# EAGLE board 14073-LuMini_3Inch-panel (EAGLE 9.0.1), part 1 of 3
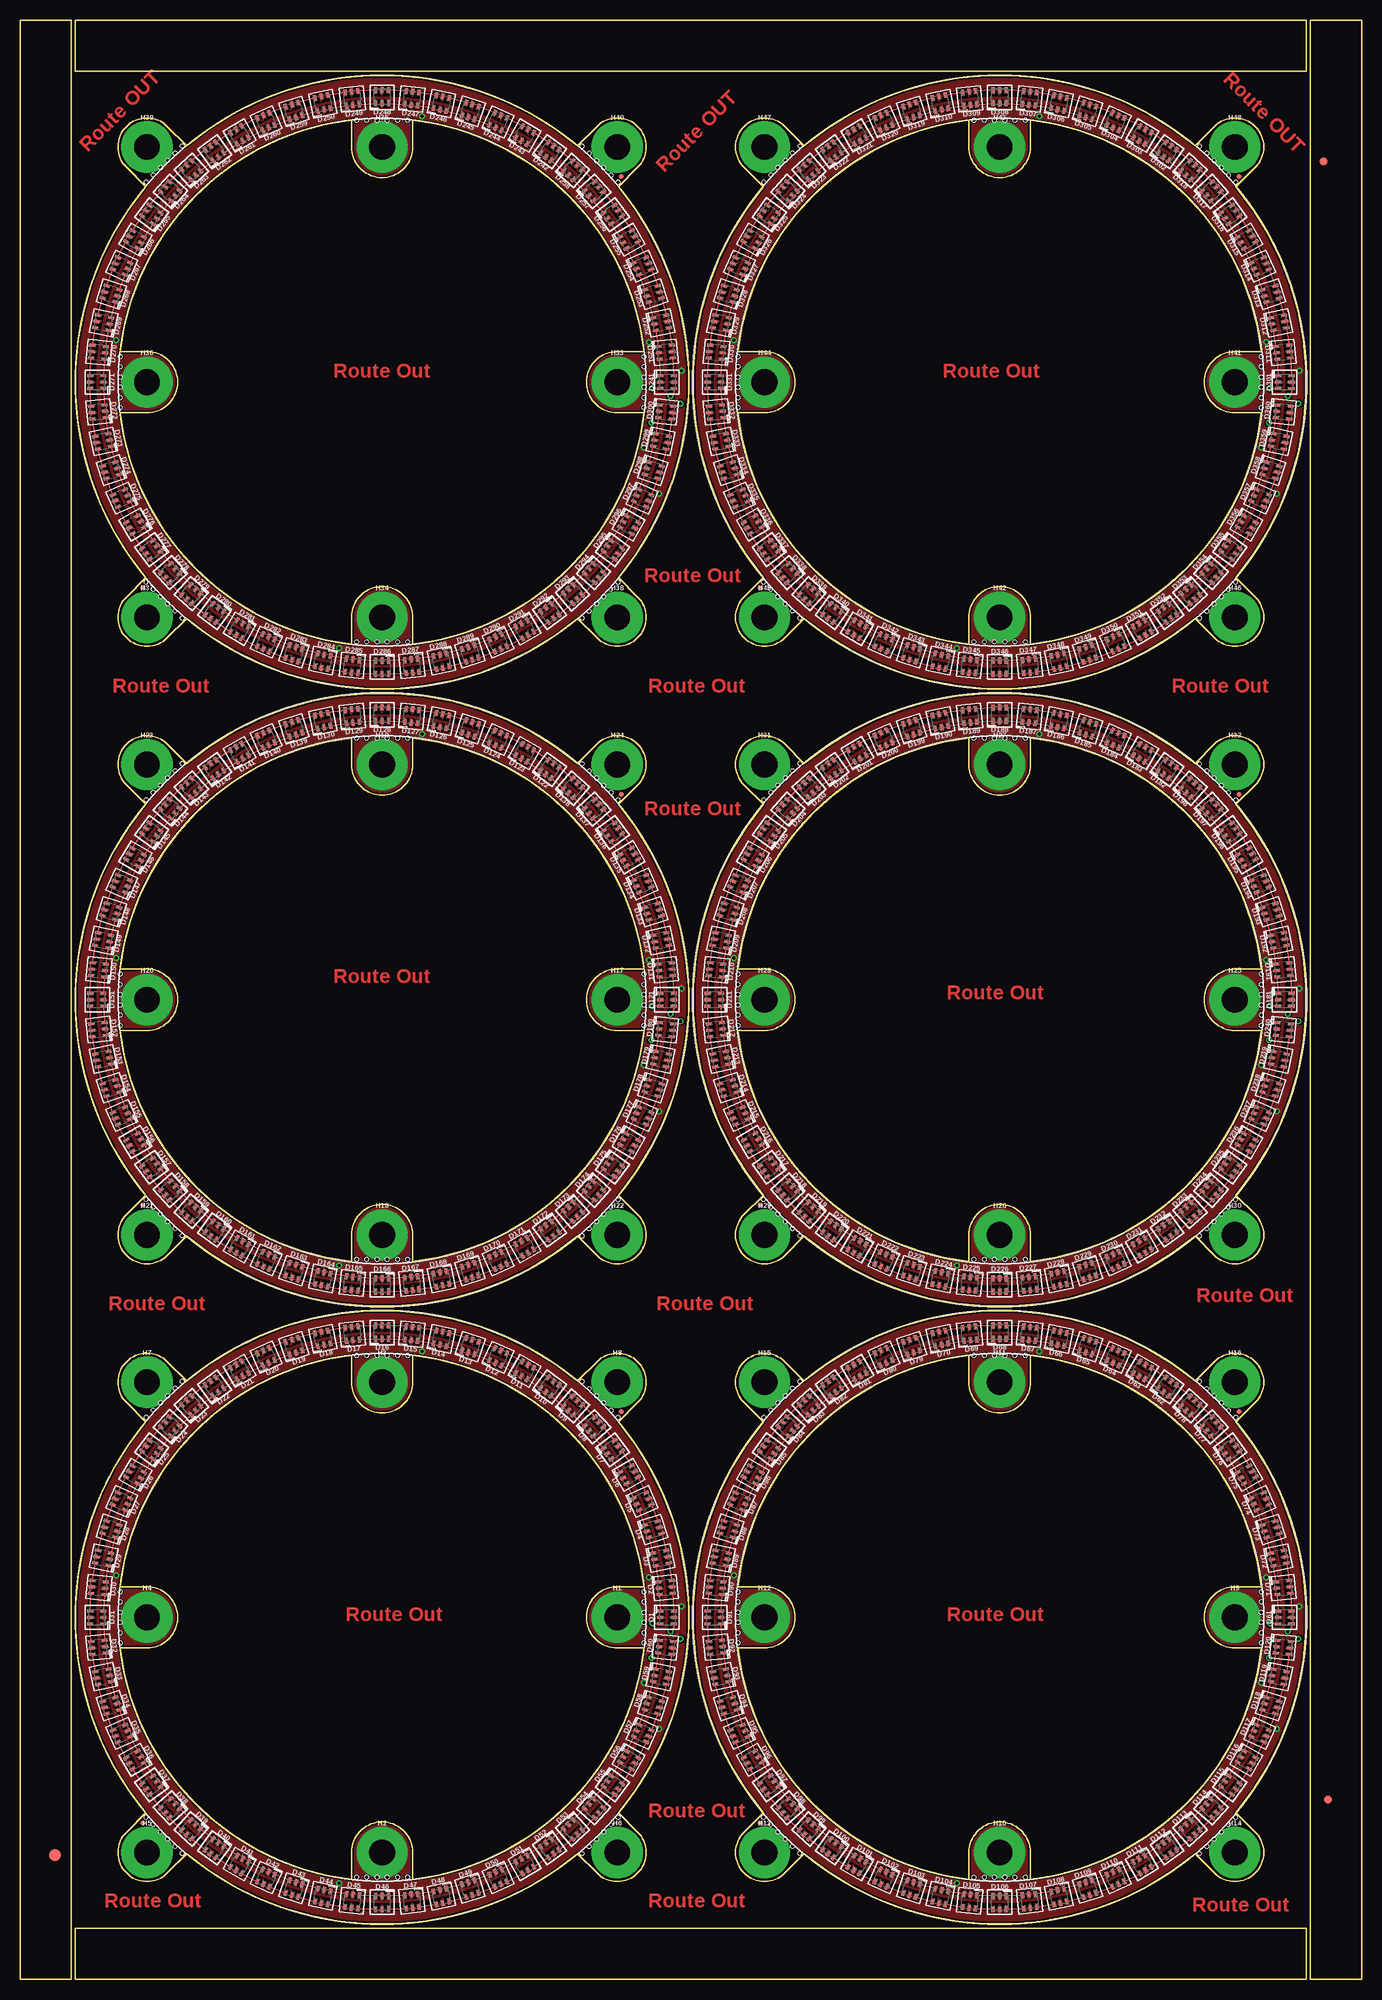
[diagram p0: board, top side]
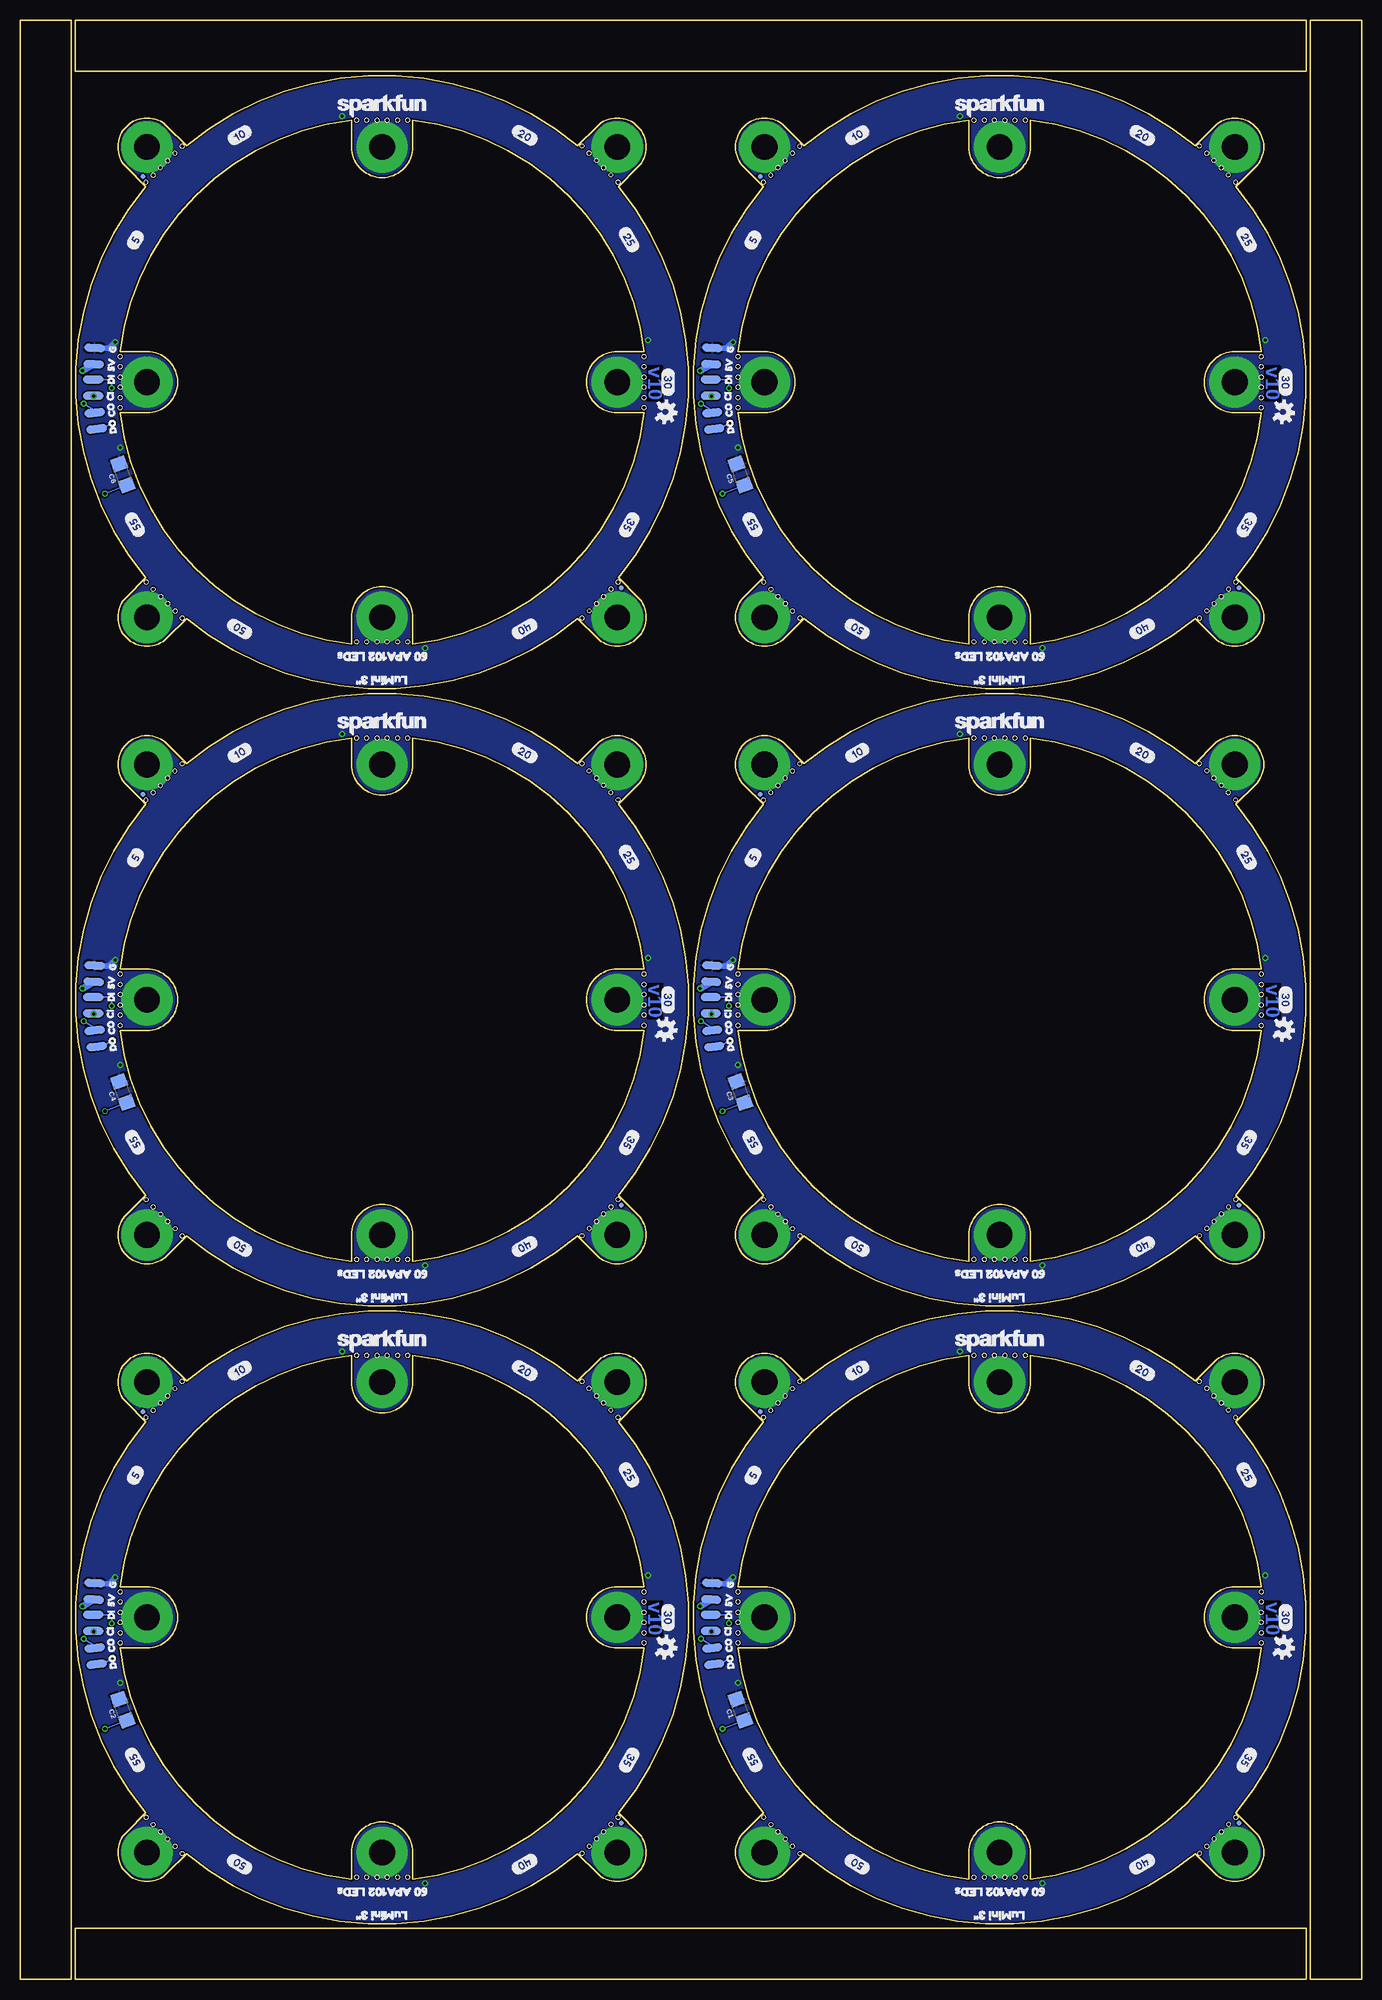
[diagram p1: board, bottom side, seen from below]

Size 166.62 x 243.33 mm. Coordinates in mm from the lower left corner, seen from the top.
Outline: 238 segments
Copper layers (1*16): Top 0.035mm / dielectric 1.5mm / Bottom 0.035mm
Design rules "SparkFun-2-layer-TIGHT": minimum track width 7mil, minimum drill 15mil, track to track 7mil, track to pad 7mil, pad to pad 7mil, via to via 7mil, smd to smd 7mil, copper to edge 7mil, drill to drill 7mil, minimum pad ring 7mil, minimum via ring 7mil, stop-mask expansion 4mil, vias tented up to drill 25mil, thermal gap 10mil
Holes 0.51 mm at 12.45,45.59 12.45,46.86 12.45,44.32 12.45,43.05 12.45,41.78 12.45,48.13 45.59,12.7 46.86,12.7 44.32,12.7 43.05,12.7 41.78,12.7 48.13,12.7 77.47,44.32 77.47,43.05 77.47,45.59 77.47,46.86 77.47,48.13 77.47,41.78 45.59,77.47 46.86,77.47 44.32,77.47 43.05,77.47 41.78,77.47 48.13,77.47 17.43,18.34 16.53,19.24 18.33,17.45 19.22,16.55 20.12,15.65 15.63,20.14 71.57,17.43 70.67,16.53 72.47,18.33 73.37,19.22 74.27,20.12 69.78,15.63 72.49,71.57 73.39,70.67 71.59,72.47 70.69,73.37 69.79,74.27 74.28,69.78 18.34,72.49 19.24,73.39 17.45,71.59 16.55,70.69 15.65,69.79 20.14,74.28 89.15,45.59 89.15,46.86 89.15,44.32 89.15,43.05 89.15,41.78 89.15,48.13 122.3,12.7 123.57,12.7 121.03,12.7 119.76,12.7 118.49,12.7 124.84,12.7 154.18,44.32 154.18,43.05 154.18,45.59 154.18,46.86 154.18,48.13 154.18,41.78 122.3,77.47 123.57,77.47 121.03,77.47 119.76,77.47 118.49,77.47 124.84,77.47 94.14,18.34 93.24,19.24 95.03,17.45 95.93,16.55 96.83,15.65 92.34,20.14 148.28,17.43 147.38,16.53 149.18,18.33 150.08,19.22 150.97,20.12 146.48,15.63 149.2,71.57 150.09,70.67 148.3,72.47 147.4,73.37 146.5,74.27 150.99,69.78 95.05,72.49 95.95,73.39 94.15,71.59 93.26,70.69 92.36,69.79 96.85,74.28 12.45,122.3 12.45,123.57 12.45,121.03 12.45,119.76 12.45,118.49 12.45,124.84 45.59,89.41 46.86,89.41 44.32,89.41 43.05,89.41 41.78,89.41 48.13,89.41 77.47,121.03 77.47,119.76 77.47,122.3 77.47,123.57 77.47,124.84 77.47,118.49 45.59,154.18 46.86,154.18 44.32,154.18 43.05,154.18 41.78,154.18 48.13,154.18 17.43,95.05 16.53,95.95 18.33,94.15 19.22,93.26 20.12,92.36 15.63,96.85 71.57,94.14 70.67,93.24 72.47,95.03 73.37,95.93 74.27,96.83 69.78,92.34 72.49,148.28 73.39,147.38 71.59,149.18 70.69,150.08 69.79,150.97 74.28,146.48 18.34,149.2 19.24,150.09 17.45,148.3 16.55,147.4 15.65,146.5 20.14,150.99 89.15,122.3 89.15,123.57 89.15,121.03 89.15,119.76 89.15,118.49 89.15,124.84 122.3,89.41 123.57,89.41 121.03,89.41 119.76,89.41 118.49,89.41 124.84,89.41 154.18,121.03 154.18,119.76 154.18,122.3 154.18,123.57 154.18,124.84 154.18,118.49 122.3,154.18 123.57,154.18 121.03,154.18 119.76,154.18 118.49,154.18 124.84,154.18 94.14,95.05 93.24,95.95 95.03,94.15 95.93,93.26 96.83,92.36 92.34,96.85 148.28,94.14 147.38,93.24 149.18,95.03 150.08,95.93 150.97,96.83 146.48,92.34 149.2,148.28 150.09,147.38 148.3,149.18 147.4,150.08 146.5,150.97 150.99,146.48 95.05,149.2 95.95,150.09 94.15,148.3 93.26,147.4 92.36,146.5 96.85,150.99 12.45,199.01 12.45,200.28 12.45,197.74 12.45,196.47 12.45,195.2 12.45,201.55 45.59,166.12 46.86,166.12 44.32,166.12 43.05,166.12 41.78,166.12 48.13,166.12 77.47,197.74 77.47,196.47 77.47,199.01 77.47,200.28 77.47,201.55 77.47,195.2 45.59,230.89 46.86,230.89 44.32,230.89 43.05,230.89 41.78,230.89 48.13,230.89 17.43,171.76 16.53,172.66 18.33,170.86 19.22,169.96 20.12,169.07 15.63,173.56 71.57,170.84 70.67,169.95 72.47,171.74 73.37,172.64 74.27,173.54 69.78,169.05 72.49,224.99 73.39,224.09 71.59,225.89 70.69,226.78 69.79,227.68 74.28,223.19 18.34,225.9 19.24,226.8 17.45,225.01 16.55,224.11 15.65,223.21 20.14,227.7 89.15,199.01 89.15,200.28 89.15,197.74 89.15,196.47 89.15,195.2 89.15,201.55 122.3,166.12 123.57,166.12 121.03,166.12 119.76,166.12 118.49,166.12 124.84,166.12 154.18,197.74 154.18,196.47 154.18,199.01 154.18,200.28 154.18,201.55 154.18,195.2 122.3,230.89 123.57,230.89 121.03,230.89 119.76,230.89 118.49,230.89 124.84,230.89 94.14,171.76 93.24,172.66 95.03,170.86 95.93,169.96 96.83,169.07 92.34,173.56 148.28,170.84 147.38,169.95 149.18,171.74 150.08,172.64 150.97,173.54 146.48,169.05 149.2,224.99 150.09,224.09 148.3,225.89 147.4,226.78 146.5,227.68 150.99,223.19 95.05,225.9 95.95,226.8 94.15,225.01 93.26,224.11 92.36,223.21 96.85,227.7

## Footprints (pad centres in the part's own frame; a part is rotated, then mirrored left to right if it is on the bottom)
1206 = smd 1.6 x 1.8: 1 -1.4,0; 2 1.4,0
APA102-2020 = smd 0.4 x 0.7: CKI -0.8,-0.85; CKO 0.8,-0.85; GND 0,0.85; SDI -0.8,0.85; SDO 0.8,0.85; VDD 0,-0.85
FIDUCIAL-1.5X3 = smd 1.5 x 1.5: 1 0,0
FIDUCIAL-1X2 = smd 1 x 1: 1 0,0
FIDUCIAL-MICRO = smd 0.635 x 0.635: 1 0,0
STANDOFF-ELECTRICAL-NOTHERMALS = drill 3.2 pad 6.35: P1 0,0
SOLDER_PAD_2 = smd 1.016 x 2.54: P$1 -1.016,0; P$2 1.016,0

## Placement (x,y rotation side)
C1  DNP  [1206]  77.15,33.49 110 bottom
C2  DNP  [1206]  153.86,33.49 110 bottom
C3  DNP  [1206]  77.15,110.2 110 bottom
C4  DNP  [1206]  153.86,110.2 110 bottom
C5  DNP  [1206]  77.15,186.91 110 bottom
C6  DNP  [1206]  153.86,186.91 110 bottom
D1  APA102-2020  [APA102-2020]  80.39,44.96 90 top
D2  APA102-2020  [APA102-2020]  80.2,48.67 96 top
D3  APA102-2020  [APA102-2020]  79.62,52.32 102 top
D4  APA102-2020  [APA102-2020]  78.66,55.9 108 top
D5  APA102-2020  [APA102-2020]  77.33,59.37 114 top
D6  APA102-2020  [APA102-2020]  75.64,62.68 120 top
D7  APA102-2020  [APA102-2020]  73.63,65.78 126 top
D8  APA102-2020  [APA102-2020]  71.29,68.67 132 top
D9  APA102-2020  [APA102-2020]  68.67,71.28 138 top
D10  APA102-2020  [APA102-2020]  65.78,73.62 144 top
D11  APA102-2020  [APA102-2020]  62.68,75.64 150 top
D12  APA102-2020  [APA102-2020]  59.37,77.33 156 top
D13  APA102-2020  [APA102-2020]  55.91,78.65 162 top
D14  APA102-2020  [APA102-2020]  52.33,79.62 168 top
D15  APA102-2020  [APA102-2020]  48.66,80.2 174 top
D16  APA102-2020  [APA102-2020]  44.95,80.39 180 top
D17  APA102-2020  [APA102-2020]  41.25,80.2 186 top
D18  APA102-2020  [APA102-2020]  37.59,79.61 192 top
D19  APA102-2020  [APA102-2020]  34.01,78.65 198 top
D20  APA102-2020  [APA102-2020]  30.54,77.34 204 top
D21  APA102-2020  [APA102-2020]  27.24,75.64 210 top
D22  APA102-2020  [APA102-2020]  24.13,73.62 216 top
D23  APA102-2020  [APA102-2020]  21.24,71.29 222 top
D24  APA102-2020  [APA102-2020]  18.63,68.67 228 top
D25  APA102-2020  [APA102-2020]  16.3,65.78 234 top
D26  APA102-2020  [APA102-2020]  14.27,62.67 240 top
D27  APA102-2020  [APA102-2020]  12.58,59.37 246 top
D28  APA102-2020  [APA102-2020]  11.26,55.91 252 top
D29  APA102-2020  [APA102-2020]  10.3,52.33 258 top
D30  APA102-2020  [APA102-2020]  9.72,48.66 264 top
D31  APA102-2020  [APA102-2020]  9.52,44.96 270 top
D32  APA102-2020  [APA102-2020]  9.72,41.25 276 top
D33  APA102-2020  [APA102-2020]  10.3,37.59 282 top
D34  APA102-2020  [APA102-2020]  11.27,34.01 288 top
D35  APA102-2020  [APA102-2020]  12.58,30.54 294 top
D36  APA102-2020  [APA102-2020]  14.28,27.24 300 top
D37  APA102-2020  [APA102-2020]  16.3,24.13 306 top
D38  APA102-2020  [APA102-2020]  18.63,21.25 312 top
D39  APA102-2020  [APA102-2020]  21.24,18.63 318 top
D40  APA102-2020  [APA102-2020]  24.13,16.29 324 top
D41  APA102-2020  [APA102-2020]  27.24,14.27 330 top
D42  APA102-2020  [APA102-2020]  30.55,12.59 336 top
D43  APA102-2020  [APA102-2020]  34.01,11.26 342 top
D44  APA102-2020  [APA102-2020]  37.59,10.3 348 top
D45  APA102-2020  [APA102-2020]  41.24,9.71 354 top
D46  APA102-2020  [APA102-2020]  44.96,9.53 0 top
D47  APA102-2020  [APA102-2020]  48.67,9.71 6 top
D48  APA102-2020  [APA102-2020]  52.32,10.29 12 top
D49  APA102-2020  [APA102-2020]  55.9,11.26 18 top
D50  APA102-2020  [APA102-2020]  59.38,12.59 24 top
D51  APA102-2020  [APA102-2020]  62.67,14.27 30 top
D52  APA102-2020  [APA102-2020]  65.79,16.29 36 top
D53  APA102-2020  [APA102-2020]  68.66,18.63 42 top
D54  APA102-2020  [APA102-2020]  71.28,21.25 48 top
D55  APA102-2020  [APA102-2020]  73.62,24.13 54 top
D56  APA102-2020  [APA102-2020]  75.64,27.24 60 top
D57  APA102-2020  [APA102-2020]  77.33,30.55 66 top
D58  APA102-2020  [APA102-2020]  78.65,34.01 72 top
D59  APA102-2020  [APA102-2020]  79.62,37.59 78 top
D60  APA102-2020  [APA102-2020]  80.2,41.25 84 top
D61  APA102-2020  [APA102-2020]  157.1,44.96 90 top
D62  APA102-2020  [APA102-2020]  142.49,73.62 144 top
D63  APA102-2020  [APA102-2020]  139.39,75.64 150 top
D64  APA102-2020  [APA102-2020]  136.08,77.33 156 top
D65  APA102-2020  [APA102-2020]  132.62,78.65 162 top
D66  APA102-2020  [APA102-2020]  129.03,79.62 168 top
D67  APA102-2020  [APA102-2020]  125.37,80.2 174 top
D68  APA102-2020  [APA102-2020]  121.66,80.39 180 top
D69  APA102-2020  [APA102-2020]  117.96,80.2 186 top
D70  APA102-2020  [APA102-2020]  114.3,79.61 192 top
D71  APA102-2020  [APA102-2020]  156.9,48.67 96 top
D72  APA102-2020  [APA102-2020]  156.33,52.32 102 top
D73  APA102-2020  [APA102-2020]  155.36,55.9 108 top
D74  APA102-2020  [APA102-2020]  154.04,59.37 114 top
D75  APA102-2020  [APA102-2020]  152.35,62.68 120 top
D76  APA102-2020  [APA102-2020]  150.33,65.78 126 top
D77  APA102-2020  [APA102-2020]  147.99,68.67 132 top
D78  APA102-2020  [APA102-2020]  145.37,71.28 138 top
D79  APA102-2020  [APA102-2020]  110.72,78.65 198 top
D80  APA102-2020  [APA102-2020]  107.25,77.34 204 top
D81  APA102-2020  [APA102-2020]  103.95,75.64 210 top
D82  APA102-2020  [APA102-2020]  100.84,73.62 216 top
D83  APA102-2020  [APA102-2020]  97.95,71.29 222 top
D84  APA102-2020  [APA102-2020]  95.34,68.67 228 top
D85  APA102-2020  [APA102-2020]  93,65.78 234 top
D86  APA102-2020  [APA102-2020]  90.98,62.67 240 top
D87  APA102-2020  [APA102-2020]  89.29,59.37 246 top
D88  APA102-2020  [APA102-2020]  87.97,55.91 252 top
D89  APA102-2020  [APA102-2020]  87.01,52.33 258 top
D90  APA102-2020  [APA102-2020]  86.43,48.66 264 top
D91  APA102-2020  [APA102-2020]  86.23,44.96 270 top
D92  APA102-2020  [APA102-2020]  86.43,41.25 276 top
D93  APA102-2020  [APA102-2020]  87.01,37.59 282 top
D94  APA102-2020  [APA102-2020]  87.98,34.01 288 top
D95  APA102-2020  [APA102-2020]  89.29,30.54 294 top
D96  APA102-2020  [APA102-2020]  90.99,27.24 300 top
D97  APA102-2020  [APA102-2020]  93,24.13 306 top
D98  APA102-2020  [APA102-2020]  95.34,21.25 312 top
D99  APA102-2020  [APA102-2020]  97.95,18.63 318 top
D100  APA102-2020  [APA102-2020]  100.84,16.29 324 top
D101  APA102-2020  [APA102-2020]  103.95,14.27 330 top
D102  APA102-2020  [APA102-2020]  107.25,12.59 336 top
D103  APA102-2020  [APA102-2020]  110.72,11.26 342 top
D104  APA102-2020  [APA102-2020]  114.3,10.3 348 top
D105  APA102-2020  [APA102-2020]  117.95,9.71 354 top
D106  APA102-2020  [APA102-2020]  121.67,9.53 0 top
D107  APA102-2020  [APA102-2020]  125.38,9.71 6 top
D108  APA102-2020  [APA102-2020]  129.03,10.29 12 top
D109  APA102-2020  [APA102-2020]  132.61,11.26 18 top
D110  APA102-2020  [APA102-2020]  136.09,12.59 24 top
D111  APA102-2020  [APA102-2020]  139.38,14.27 30 top
D112  APA102-2020  [APA102-2020]  142.5,16.29 36 top
D113  APA102-2020  [APA102-2020]  145.37,18.63 42 top
D114  APA102-2020  [APA102-2020]  147.99,21.25 48 top
D115  APA102-2020  [APA102-2020]  150.33,24.13 54 top
D116  APA102-2020  [APA102-2020]  152.35,27.24 60 top
D117  APA102-2020  [APA102-2020]  154.03,30.55 66 top
D118  APA102-2020  [APA102-2020]  155.36,34.01 72 top
D119  APA102-2020  [APA102-2020]  156.33,37.59 78 top
D120  APA102-2020  [APA102-2020]  156.91,41.25 84 top
D121  APA102-2020  [APA102-2020]  80.39,121.67 90 top
D122  APA102-2020  [APA102-2020]  65.78,150.33 144 top
D123  APA102-2020  [APA102-2020]  62.68,152.34 150 top
D124  APA102-2020  [APA102-2020]  59.37,154.04 156 top
D125  APA102-2020  [APA102-2020]  55.91,155.36 162 top
D126  APA102-2020  [APA102-2020]  52.33,156.33 168 top
D127  APA102-2020  [APA102-2020]  48.66,156.91 174 top
D128  APA102-2020  [APA102-2020]  44.95,157.1 180 top
D129  APA102-2020  [APA102-2020]  41.25,156.91 186 top
D130  APA102-2020  [APA102-2020]  37.59,156.32 192 top
D131  APA102-2020  [APA102-2020]  80.2,125.38 96 top
D132  APA102-2020  [APA102-2020]  79.62,129.03 102 top
D133  APA102-2020  [APA102-2020]  78.66,132.61 108 top
D134  APA102-2020  [APA102-2020]  77.33,136.08 114 top
D135  APA102-2020  [APA102-2020]  75.64,139.39 120 top
D136  APA102-2020  [APA102-2020]  73.63,142.49 126 top
D137  APA102-2020  [APA102-2020]  71.29,145.38 132 top
D138  APA102-2020  [APA102-2020]  68.67,147.99 138 top
D139  APA102-2020  [APA102-2020]  34.01,155.36 198 top
D140  APA102-2020  [APA102-2020]  30.54,154.04 204 top
D141  APA102-2020  [APA102-2020]  27.24,152.35 210 top
D142  APA102-2020  [APA102-2020]  24.13,150.33 216 top
D143  APA102-2020  [APA102-2020]  21.24,148 222 top
D144  APA102-2020  [APA102-2020]  18.63,145.38 228 top
D145  APA102-2020  [APA102-2020]  16.3,142.49 234 top
D146  APA102-2020  [APA102-2020]  14.27,139.38 240 top
D147  APA102-2020  [APA102-2020]  12.58,136.08 246 top
D148  APA102-2020  [APA102-2020]  11.26,132.62 252 top
D149  APA102-2020  [APA102-2020]  10.3,129.04 258 top
D150  APA102-2020  [APA102-2020]  9.72,125.37 264 top
D151  APA102-2020  [APA102-2020]  9.52,121.67 270 top
D152  APA102-2020  [APA102-2020]  9.72,117.96 276 top
D153  APA102-2020  [APA102-2020]  10.3,114.3 282 top
D154  APA102-2020  [APA102-2020]  11.27,110.72 288 top
D155  APA102-2020  [APA102-2020]  12.58,107.25 294 top
D156  APA102-2020  [APA102-2020]  14.28,103.95 300 top
D157  APA102-2020  [APA102-2020]  16.3,100.84 306 top
D158  APA102-2020  [APA102-2020]  18.63,97.96 312 top
D159  APA102-2020  [APA102-2020]  21.24,95.34 318 top
D160  APA102-2020  [APA102-2020]  24.13,93 324 top
D161  APA102-2020  [APA102-2020]  27.24,90.98 330 top
D162  APA102-2020  [APA102-2020]  30.55,89.3 336 top
D163  APA102-2020  [APA102-2020]  34.01,87.97 342 top
D164  APA102-2020  [APA102-2020]  37.59,87.01 348 top
D165  APA102-2020  [APA102-2020]  41.24,86.42 354 top
D166  APA102-2020  [APA102-2020]  44.96,86.24 0 top
D167  APA102-2020  [APA102-2020]  48.67,86.42 6 top
D168  APA102-2020  [APA102-2020]  52.32,87 12 top
D169  APA102-2020  [APA102-2020]  55.9,87.97 18 top
D170  APA102-2020  [APA102-2020]  59.38,89.3 24 top
D171  APA102-2020  [APA102-2020]  62.67,90.98 30 top
D172  APA102-2020  [APA102-2020]  65.79,93 36 top
D173  APA102-2020  [APA102-2020]  68.66,95.34 42 top
D174  APA102-2020  [APA102-2020]  71.28,97.96 48 top
D175  APA102-2020  [APA102-2020]  73.62,100.84 54 top
D176  APA102-2020  [APA102-2020]  75.64,103.95 60 top
D177  APA102-2020  [APA102-2020]  77.33,107.26 66 top
D178  APA102-2020  [APA102-2020]  78.65,110.72 72 top
D179  APA102-2020  [APA102-2020]  79.62,114.3 78 top
D180  APA102-2020  [APA102-2020]  80.2,117.96 84 top
D181  APA102-2020  [APA102-2020]  157.1,121.67 90 top
D182  APA102-2020  [APA102-2020]  142.49,150.33 144 top
D183  APA102-2020  [APA102-2020]  139.39,152.34 150 top
D184  APA102-2020  [APA102-2020]  136.08,154.04 156 top
D185  APA102-2020  [APA102-2020]  132.62,155.36 162 top
D186  APA102-2020  [APA102-2020]  129.03,156.33 168 top
D187  APA102-2020  [APA102-2020]  125.37,156.91 174 top
D188  APA102-2020  [APA102-2020]  121.66,157.1 180 top
D189  APA102-2020  [APA102-2020]  117.96,156.91 186 top
D190  APA102-2020  [APA102-2020]  114.3,156.32 192 top
D191  APA102-2020  [APA102-2020]  156.9,125.38 96 top
D192  APA102-2020  [APA102-2020]  156.33,129.03 102 top
D193  APA102-2020  [APA102-2020]  155.36,132.61 108 top
D194  APA102-2020  [APA102-2020]  154.04,136.08 114 top
D195  APA102-2020  [APA102-2020]  152.35,139.39 120 top
D196  APA102-2020  [APA102-2020]  150.33,142.49 126 top
D197  APA102-2020  [APA102-2020]  147.99,145.38 132 top
D198  APA102-2020  [APA102-2020]  145.37,147.99 138 top
D199  APA102-2020  [APA102-2020]  110.72,155.36 198 top
D200  APA102-2020  [APA102-2020]  107.25,154.04 204 top
D201  APA102-2020  [APA102-2020]  103.95,152.35 210 top
D202  APA102-2020  [APA102-2020]  100.84,150.33 216 top
D203  APA102-2020  [APA102-2020]  97.95,148 222 top
D204  APA102-2020  [APA102-2020]  95.34,145.38 228 top
D205  APA102-2020  [APA102-2020]  93,142.49 234 top
D206  APA102-2020  [APA102-2020]  90.98,139.38 240 top
D207  APA102-2020  [APA102-2020]  89.29,136.08 246 top
D208  APA102-2020  [APA102-2020]  87.97,132.62 252 top
D209  APA102-2020  [APA102-2020]  87.01,129.04 258 top
D210  APA102-2020  [APA102-2020]  86.43,125.37 264 top
D211  APA102-2020  [APA102-2020]  86.23,121.67 270 top
D212  APA102-2020  [APA102-2020]  86.43,117.96 276 top
D213  APA102-2020  [APA102-2020]  87.01,114.3 282 top
D214  APA102-2020  [APA102-2020]  87.98,110.72 288 top
D215  APA102-2020  [APA102-2020]  89.29,107.25 294 top
D216  APA102-2020  [APA102-2020]  90.99,103.95 300 top
D217  APA102-2020  [APA102-2020]  93,100.84 306 top
D218  APA102-2020  [APA102-2020]  95.34,97.96 312 top
D219  APA102-2020  [APA102-2020]  97.95,95.34 318 top
D220  APA102-2020  [APA102-2020]  100.84,93 324 top
D221  APA102-2020  [APA102-2020]  103.95,90.98 330 top
D222  APA102-2020  [APA102-2020]  107.25,89.3 336 top
D223  APA102-2020  [APA102-2020]  110.72,87.97 342 top
D224  APA102-2020  [APA102-2020]  114.3,87.01 348 top
D225  APA102-2020  [APA102-2020]  117.95,86.42 354 top
D226  APA102-2020  [APA102-2020]  121.67,86.24 0 top
D227  APA102-2020  [APA102-2020]  125.38,86.42 6 top
D228  APA102-2020  [APA102-2020]  129.03,87 12 top
D229  APA102-2020  [APA102-2020]  132.61,87.97 18 top
D230  APA102-2020  [APA102-2020]  136.09,89.3 24 top
D231  APA102-2020  [APA102-2020]  139.38,90.98 30 top
D232  APA102-2020  [APA102-2020]  142.5,93 36 top
D233  APA102-2020  [APA102-2020]  145.37,95.34 42 top
D234  APA102-2020  [APA102-2020]  147.99,97.96 48 top
D235  APA102-2020  [APA102-2020]  150.33,100.84 54 top
D236  APA102-2020  [APA102-2020]  152.35,103.95 60 top
D237  APA102-2020  [APA102-2020]  154.03,107.26 66 top
D238  APA102-2020  [APA102-2020]  155.36,110.72 72 top
D239  APA102-2020  [APA102-2020]  156.33,114.3 78 top
D240  APA102-2020  [APA102-2020]  156.91,117.96 84 top
D241  APA102-2020  [APA102-2020]  80.39,198.37 90 top
D242  APA102-2020  [APA102-2020]  65.78,227.04 144 top
D243  APA102-2020  [APA102-2020]  62.68,229.05 150 top
D244  APA102-2020  [APA102-2020]  59.37,230.74 156 top
D245  APA102-2020  [APA102-2020]  55.91,232.07 162 top
D246  APA102-2020  [APA102-2020]  52.33,233.04 168 top
D247  APA102-2020  [APA102-2020]  48.66,233.62 174 top
D248  APA102-2020  [APA102-2020]  44.95,233.81 180 top
D249  APA102-2020  [APA102-2020]  41.25,233.61 186 top
D250  APA102-2020  [APA102-2020]  37.59,233.03 192 top
D251  APA102-2020  [APA102-2020]  80.2,202.08 96 top
D252  APA102-2020  [APA102-2020]  79.62,205.74 102 top
D253  APA102-2020  [APA102-2020]  78.66,209.32 108 top
D254  APA102-2020  [APA102-2020]  77.33,212.79 114 top
D255  APA102-2020  [APA102-2020]  75.64,216.09 120 top
D256  APA102-2020  [APA102-2020]  73.63,219.2 126 top
D257  APA102-2020  [APA102-2020]  71.29,222.09 132 top
D258  APA102-2020  [APA102-2020]  68.67,224.7 138 top
D259  APA102-2020  [APA102-2020]  34.01,232.07 198 top
D260  APA102-2020  [APA102-2020]  30.54,230.75 204 top
D261  APA102-2020  [APA102-2020]  27.24,229.06 210 top
D262  APA102-2020  [APA102-2020]  24.13,227.04 216 top
D263  APA102-2020  [APA102-2020]  21.24,224.71 222 top
D264  APA102-2020  [APA102-2020]  18.63,222.09 228 top
D265  APA102-2020  [APA102-2020]  16.3,219.2 234 top
D266  APA102-2020  [APA102-2020]  14.27,216.09 240 top
D267  APA102-2020  [APA102-2020]  12.58,212.78 246 top
D268  APA102-2020  [APA102-2020]  11.26,209.33 252 top
D269  APA102-2020  [APA102-2020]  10.3,205.75 258 top
D270  APA102-2020  [APA102-2020]  9.72,202.08 264 top
D271  APA102-2020  [APA102-2020]  9.52,198.37 270 top
D272  APA102-2020  [APA102-2020]  9.72,194.67 276 top
D273  APA102-2020  [APA102-2020]  10.3,191.01 282 top
D274  APA102-2020  [APA102-2020]  11.27,187.42 288 top
D275  APA102-2020  [APA102-2020]  12.58,183.96 294 top
D276  APA102-2020  [APA102-2020]  14.28,180.66 300 top
D277  APA102-2020  [APA102-2020]  16.3,177.55 306 top
D278  APA102-2020  [APA102-2020]  18.63,174.67 312 top
D279  APA102-2020  [APA102-2020]  21.24,172.05 318 top
D280  APA102-2020  [APA102-2020]  24.13,169.71 324 top
D281  APA102-2020  [APA102-2020]  27.24,167.69 330 top
D282  APA102-2020  [APA102-2020]  30.55,166 336 top
D283  APA102-2020  [APA102-2020]  34.01,164.68 342 top
D284  APA102-2020  [APA102-2020]  37.59,163.72 348 top
D285  APA102-2020  [APA102-2020]  41.24,163.13 354 top
D286  APA102-2020  [APA102-2020]  44.96,162.94 0 top
D287  APA102-2020  [APA102-2020]  48.67,163.13 6 top
D288  APA102-2020  [APA102-2020]  52.32,163.71 12 top
D289  APA102-2020  [APA102-2020]  55.9,164.68 18 top
D290  APA102-2020  [APA102-2020]  59.38,166 24 top
D291  APA102-2020  [APA102-2020]  62.67,167.69 30 top
D292  APA102-2020  [APA102-2020]  65.79,169.71 36 top
D293  APA102-2020  [APA102-2020]  68.66,172.05 42 top
D294  APA102-2020  [APA102-2020]  71.28,174.67 48 top
D295  APA102-2020  [APA102-2020]  73.62,177.55 54 top
D296  APA102-2020  [APA102-2020]  75.64,180.65 60 top
D297  APA102-2020  [APA102-2020]  77.33,183.96 66 top
D298  APA102-2020  [APA102-2020]  78.65,187.42 72 top
D299  APA102-2020  [APA102-2020]  79.62,191.01 78 top
D300  APA102-2020  [APA102-2020]  80.2,194.66 84 top
D301  APA102-2020  [APA102-2020]  157.1,198.37 90 top
D302  APA102-2020  [APA102-2020]  142.49,227.04 144 top
D303  APA102-2020  [APA102-2020]  139.39,229.05 150 top
D304  APA102-2020  [APA102-2020]  136.08,230.74 156 top
D305  APA102-2020  [APA102-2020]  132.62,232.07 162 top
D306  APA102-2020  [APA102-2020]  129.03,233.04 168 top
D307  APA102-2020  [APA102-2020]  125.37,233.62 174 top
D308  APA102-2020  [APA102-2020]  121.66,233.81 180 top
D309  APA102-2020  [APA102-2020]  117.96,233.61 186 top
D310  APA102-2020  [APA102-2020]  114.3,233.03 192 top
D311  APA102-2020  [APA102-2020]  156.9,202.08 96 top
D312  APA102-2020  [APA102-2020]  156.33,205.74 102 top
D313  APA102-2020  [APA102-2020]  155.36,209.32 108 top
D314  APA102-2020  [APA102-2020]  154.04,212.79 114 top
D315  APA102-2020  [APA102-2020]  152.35,216.09 120 top
D316  APA102-2020  [APA102-2020]  150.33,219.2 126 top
D317  APA102-2020  [APA102-2020]  147.99,222.09 132 top
D318  APA102-2020  [APA102-2020]  145.37,224.7 138 top
D319  APA102-2020  [APA102-2020]  110.72,232.07 198 top
D320  APA102-2020  [APA102-2020]  107.25,230.75 204 top
D321  APA102-2020  [APA102-2020]  103.95,229.06 210 top
D322  APA102-2020  [APA102-2020]  100.84,227.04 216 top
D323  APA102-2020  [APA102-2020]  97.95,224.71 222 top
D324  APA102-2020  [APA102-2020]  95.34,222.09 228 top
D325  APA102-2020  [APA102-2020]  93,219.2 234 top
D326  APA102-2020  [APA102-2020]  90.98,216.09 240 top
D327  APA102-2020  [APA102-2020]  89.29,212.78 246 top
D328  APA102-2020  [APA102-2020]  87.97,209.33 252 top
D329  APA102-2020  [APA102-2020]  87.01,205.75 258 top
D330  APA102-2020  [APA102-2020]  86.43,202.08 264 top
D331  APA102-2020  [APA102-2020]  86.23,198.37 270 top
D332  APA102-2020  [APA102-2020]  86.43,194.67 276 top
D333  APA102-2020  [APA102-2020]  87.01,191.01 282 top
D334  APA102-2020  [APA102-2020]  87.98,187.42 288 top
D335  APA102-2020  [APA102-2020]  89.29,183.96 294 top
D336  APA102-2020  [APA102-2020]  90.99,180.66 300 top
D337  APA102-2020  [APA102-2020]  93,177.55 306 top
D338  APA102-2020  [APA102-2020]  95.34,174.67 312 top
D339  APA102-2020  [APA102-2020]  97.95,172.05 318 top
D340  APA102-2020  [APA102-2020]  100.84,169.71 324 top
D341  APA102-2020  [APA102-2020]  103.95,167.69 330 top
D342  APA102-2020  [APA102-2020]  107.25,166 336 top
D343  APA102-2020  [APA102-2020]  110.72,164.68 342 top
D344  APA102-2020  [APA102-2020]  114.3,163.72 348 top
D345  APA102-2020  [APA102-2020]  117.95,163.13 354 top
D346  APA102-2020  [APA102-2020]  121.67,162.94 0 top
D347  APA102-2020  [APA102-2020]  125.38,163.13 6 top
D348  APA102-2020  [APA102-2020]  129.03,163.71 12 top
D349  APA102-2020  [APA102-2020]  132.61,164.68 18 top
D350  APA102-2020  [APA102-2020]  136.09,166 24 top
D351  APA102-2020  [APA102-2020]  139.38,167.69 30 top
D352  APA102-2020  [APA102-2020]  142.5,169.71 36 top
D353  APA102-2020  [APA102-2020]  145.37,172.05 42 top
D354  APA102-2020  [APA102-2020]  147.99,174.67 48 top
D355  APA102-2020  [APA102-2020]  150.33,177.55 54 top
D356  APA102-2020  [APA102-2020]  152.35,180.65 60 top
D357  APA102-2020  [APA102-2020]  154.03,183.96 66 top
D358  APA102-2020  [APA102-2020]  155.36,187.42 72 top
D359  APA102-2020  [APA102-2020]  156.33,191.01 78 top
D360  APA102-2020  [APA102-2020]  156.91,194.66 84 top
E$6  [FIDUCIAL-1.5X3]  4.32,15.43 0 top
E$7  [FIDUCIAL-1X2]  161.93,225.81 180 top
E$8  [FIDUCIAL-1X2]  162.43,22.35 0 top
FD1  FIDUCIALUFIDUCIAL  [FIDUCIAL-MICRO]  15.24,19.43 0 top
FD2  FIDUCIALUFIDUCIAL  [FIDUCIAL-MICRO]  15.24,19.43 90 bottom
FD3  FIDUCIALUFIDUCIAL  [FIDUCIAL-MICRO]  74.68,70.48 0 top
FD4  FIDUCIALUFIDUCIAL  [FIDUCIAL-MICRO]  74.68,70.48 0 bottom
FD5  FIDUCIALUFIDUCIAL  [FIDUCIAL-MICRO]  91.95,19.43 0 top
FD6  FIDUCIALUFIDUCIAL  [FIDUCIAL-MICRO]  91.95,19.43 90 bottom
FD7  FIDUCIALUFIDUCIAL  [FIDUCIAL-MICRO]  151.38,70.48 0 top
FD8  FIDUCIALUFIDUCIAL  [FIDUCIAL-MICRO]  151.38,70.48 0 bottom
FD9  FIDUCIALUFIDUCIAL  [FIDUCIAL-MICRO]  15.24,96.14 0 top
FD10  FIDUCIALUFIDUCIAL  [FIDUCIAL-MICRO]  15.24,96.14 90 bottom
FD11  FIDUCIALUFIDUCIAL  [FIDUCIAL-MICRO]  74.68,147.19 0 top
FD12  FIDUCIALUFIDUCIAL  [FIDUCIAL-MICRO]  74.68,147.19 0 bottom
FD13  FIDUCIALUFIDUCIAL  [FIDUCIAL-MICRO]  91.95,96.14 0 top
FD14  FIDUCIALUFIDUCIAL  [FIDUCIAL-MICRO]  91.95,96.14 90 bottom
FD15  FIDUCIALUFIDUCIAL  [FIDUCIAL-MICRO]  151.38,147.19 0 top
FD16  FIDUCIALUFIDUCIAL  [FIDUCIAL-MICRO]  151.38,147.19 0 bottom
FD17  FIDUCIALUFIDUCIAL  [FIDUCIAL-MICRO]  15.24,172.85 0 top
FD18  FIDUCIALUFIDUCIAL  [FIDUCIAL-MICRO]  15.24,172.85 90 bottom
FD19  FIDUCIALUFIDUCIAL  [FIDUCIAL-MICRO]  74.68,223.9 0 top
FD20  FIDUCIALUFIDUCIAL  [FIDUCIAL-MICRO]  74.68,223.9 0 bottom
FD21  FIDUCIALUFIDUCIAL  [FIDUCIAL-MICRO]  91.95,172.85 0 top
FD22  FIDUCIALUFIDUCIAL  [FIDUCIAL-MICRO]  91.95,172.85 90 bottom
FD23  FIDUCIALUFIDUCIAL  [FIDUCIAL-MICRO]  151.38,223.9 0 top
FD24  FIDUCIALUFIDUCIAL  [FIDUCIAL-MICRO]  151.38,223.9 0 bottom
H1  STANDOFF_ELECTRICAL-NOTHERMALS  [STANDOFF-ELECTRICAL-NOTHERMALS]  74.17,44.96 0 top
H2  STANDOFF_ELECTRICAL-NOTHERMALS  [STANDOFF-ELECTRICAL-NOTHERMALS]  44.96,15.75 0 top
H3  STANDOFF_ELECTRICAL-NOTHERMALS  [STANDOFF-ELECTRICAL-NOTHERMALS]  44.96,74.17 0 top
H4  STANDOFF_ELECTRICAL-NOTHERMALS  [STANDOFF-ELECTRICAL-NOTHERMALS]  15.75,44.96 0 top
H5  STANDOFF_ELECTRICAL-NOTHERMALS  [STANDOFF-ELECTRICAL-NOTHERMALS]  15.75,15.75 0 top
H6  STANDOFF_ELECTRICAL-NOTHERMALS  [STANDOFF-ELECTRICAL-NOTHERMALS]  74.17,15.75 0 top
H7  STANDOFF_ELECTRICAL-NOTHERMALS  [STANDOFF-ELECTRICAL-NOTHERMALS]  15.75,74.17 0 top
H8  STANDOFF_ELECTRICAL-NOTHERMALS  [STANDOFF-ELECTRICAL-NOTHERMALS]  74.17,74.17 0 top
H9  STANDOFF_ELECTRICAL-NOTHERMALS  [STANDOFF-ELECTRICAL-NOTHERMALS]  150.88,44.96 0 top
H10  STANDOFF_ELECTRICAL-NOTHERMALS  [STANDOFF-ELECTRICAL-NOTHERMALS]  121.67,15.75 0 top
H11  STANDOFF_ELECTRICAL-NOTHERMALS  [STANDOFF-ELECTRICAL-NOTHERMALS]  121.67,74.17 0 top
H12  STANDOFF_ELECTRICAL-NOTHERMALS  [STANDOFF-ELECTRICAL-NOTHERMALS]  92.46,44.96 0 top
H13  STANDOFF_ELECTRICAL-NOTHERMALS  [STANDOFF-ELECTRICAL-NOTHERMALS]  92.46,15.75 0 top
H14  STANDOFF_ELECTRICAL-NOTHERMALS  [STANDOFF-ELECTRICAL-NOTHERMALS]  150.88,15.75 0 top
H15  STANDOFF_ELECTRICAL-NOTHERMALS  [STANDOFF-ELECTRICAL-NOTHERMALS]  92.46,74.17 0 top
H16  STANDOFF_ELECTRICAL-NOTHERMALS  [STANDOFF-ELECTRICAL-NOTHERMALS]  150.88,74.17 0 top
H17  STANDOFF_ELECTRICAL-NOTHERMALS  [STANDOFF-ELECTRICAL-NOTHERMALS]  74.17,121.67 0 top
H18  STANDOFF_ELECTRICAL-NOTHERMALS  [STANDOFF-ELECTRICAL-NOTHERMALS]  44.96,92.46 0 top
H19  STANDOFF_ELECTRICAL-NOTHERMALS  [STANDOFF-ELECTRICAL-NOTHERMALS]  44.96,150.88 0 top
H20  STANDOFF_ELECTRICAL-NOTHERMALS  [STANDOFF-ELECTRICAL-NOTHERMALS]  15.75,121.67 0 top
H21  STANDOFF_ELECTRICAL-NOTHERMALS  [STANDOFF-ELECTRICAL-NOTHERMALS]  15.75,92.46 0 top
H22  STANDOFF_ELECTRICAL-NOTHERMALS  [STANDOFF-ELECTRICAL-NOTHERMALS]  74.17,92.46 0 top
H23  STANDOFF_ELECTRICAL-NOTHERMALS  [STANDOFF-ELECTRICAL-NOTHERMALS]  15.75,150.88 0 top
H24  STANDOFF_ELECTRICAL-NOTHERMALS  [STANDOFF-ELECTRICAL-NOTHERMALS]  74.17,150.88 0 top
H25  STANDOFF_ELECTRICAL-NOTHERMALS  [STANDOFF-ELECTRICAL-NOTHERMALS]  150.88,121.67 0 top
H26  STANDOFF_ELECTRICAL-NOTHERMALS  [STANDOFF-ELECTRICAL-NOTHERMALS]  121.67,92.46 0 top
H27  STANDOFF_ELECTRICAL-NOTHERMALS  [STANDOFF-ELECTRICAL-NOTHERMALS]  121.67,150.88 0 top
H28  STANDOFF_ELECTRICAL-NOTHERMALS  [STANDOFF-ELECTRICAL-NOTHERMALS]  92.46,121.67 0 top
H29  STANDOFF_ELECTRICAL-NOTHERMALS  [STANDOFF-ELECTRICAL-NOTHERMALS]  92.46,92.46 0 top
H30  STANDOFF_ELECTRICAL-NOTHERMALS  [STANDOFF-ELECTRICAL-NOTHERMALS]  150.88,92.46 0 top
H31  STANDOFF_ELECTRICAL-NOTHERMALS  [STANDOFF-ELECTRICAL-NOTHERMALS]  92.46,150.88 0 top
H32  STANDOFF_ELECTRICAL-NOTHERMALS  [STANDOFF-ELECTRICAL-NOTHERMALS]  150.88,150.88 0 top
H33  STANDOFF_ELECTRICAL-NOTHERMALS  [STANDOFF-ELECTRICAL-NOTHERMALS]  74.17,198.37 0 top
H34  STANDOFF_ELECTRICAL-NOTHERMALS  [STANDOFF-ELECTRICAL-NOTHERMALS]  44.96,169.16 0 top
H35  STANDOFF_ELECTRICAL-NOTHERMALS  [STANDOFF-ELECTRICAL-NOTHERMALS]  44.96,227.58 0 top
H36  STANDOFF_ELECTRICAL-NOTHERMALS  [STANDOFF-ELECTRICAL-NOTHERMALS]  15.75,198.37 0 top
H37  STANDOFF_ELECTRICAL-NOTHERMALS  [STANDOFF-ELECTRICAL-NOTHERMALS]  15.75,169.16 0 top
H38  STANDOFF_ELECTRICAL-NOTHERMALS  [STANDOFF-ELECTRICAL-NOTHERMALS]  74.17,169.16 0 top
H39  STANDOFF_ELECTRICAL-NOTHERMALS  [STANDOFF-ELECTRICAL-NOTHERMALS]  15.75,227.58 0 top
H40  STANDOFF_ELECTRICAL-NOTHERMALS  [STANDOFF-ELECTRICAL-NOTHERMALS]  74.17,227.58 0 top
H41  STANDOFF_ELECTRICAL-NOTHERMALS  [STANDOFF-ELECTRICAL-NOTHERMALS]  150.88,198.37 0 top
H42  STANDOFF_ELECTRICAL-NOTHERMALS  [STANDOFF-ELECTRICAL-NOTHERMALS]  121.67,169.16 0 top
H43  STANDOFF_ELECTRICAL-NOTHERMALS  [STANDOFF-ELECTRICAL-NOTHERMALS]  121.67,227.58 0 top
H44  STANDOFF_ELECTRICAL-NOTHERMALS  [STANDOFF-ELECTRICAL-NOTHERMALS]  92.46,198.37 0 top
H45  STANDOFF_ELECTRICAL-NOTHERMALS  [STANDOFF-ELECTRICAL-NOTHERMALS]  92.46,169.16 0 top
H46  STANDOFF_ELECTRICAL-NOTHERMALS  [STANDOFF-ELECTRICAL-NOTHERMALS]  150.88,169.16 0 top
H47  STANDOFF_ELECTRICAL-NOTHERMALS  [STANDOFF-ELECTRICAL-NOTHERMALS]  92.46,227.58 0 top
H48  STANDOFF_ELECTRICAL-NOTHERMALS  [STANDOFF-ELECTRICAL-NOTHERMALS]  150.88,227.58 0 top
J1  SOLDER_PAD_2  [SOLDER_PAD_2]  80.71,48.2 266.4 bottom
J2  SOLDER_PAD_2  [SOLDER_PAD_2]  80.84,44.27 270 bottom
J3  SOLDER_PAD_2  [SOLDER_PAD_2]  80.53,40.16 97 bottom
J4  SOLDER_PAD_2  [SOLDER_PAD_2]  157.42,48.2 266.4 bottom
J5  SOLDER_PAD_2  [SOLDER_PAD_2]  157.54,44.27 270 bottom
J6  SOLDER_PAD_2  [SOLDER_PAD_2]  157.24,40.16 97 bottom
J7  SOLDER_PAD_2  [SOLDER_PAD_2]  80.71,124.9 266.4 bottom
J8  SOLDER_PAD_2  [SOLDER_PAD_2]  80.84,120.98 270 bottom
J9  SOLDER_PAD_2  [SOLDER_PAD_2]  80.53,116.87 97 bottom
J10  SOLDER_PAD_2  [SOLDER_PAD_2]  157.42,124.9 266.4 bottom
J11  SOLDER_PAD_2  [SOLDER_PAD_2]  157.54,120.98 270 bottom
J12  SOLDER_PAD_2  [SOLDER_PAD_2]  157.24,116.87 97 bottom
J13  SOLDER_PAD_2  [SOLDER_PAD_2]  80.71,201.61 266.4 bottom
J14  SOLDER_PAD_2  [SOLDER_PAD_2]  80.84,197.69 270 bottom
J15  SOLDER_PAD_2  [SOLDER_PAD_2]  80.53,193.57 97 bottom
J16  SOLDER_PAD_2  [SOLDER_PAD_2]  157.42,201.61 266.4 bottom
J17  SOLDER_PAD_2  [SOLDER_PAD_2]  157.54,197.69 270 bottom
J18  SOLDER_PAD_2  [SOLDER_PAD_2]  157.24,193.57 97 bottom
LOGO1  OSHW-LOGOS  [OSHW-LOGO-S]  9.78,41.27 264 bottom
LOGO2  SFE_LOGO_NAME.1_INCH  [SFE_LOGO_NAME_.1]  44.96,79.25 0 bottom
LOGO3  OSHW-LOGOS  [OSHW-LOGO-S]  86.49,41.27 264 bottom
LOGO4  SFE_LOGO_NAME.1_INCH  [SFE_LOGO_NAME_.1]  121.67,79.25 0 bottom
LOGO5  OSHW-LOGOS  [OSHW-LOGO-S]  9.78,117.98 264 bottom
LOGO6  SFE_LOGO_NAME.1_INCH  [SFE_LOGO_NAME_.1]  44.96,155.96 0 bottom
LOGO7  OSHW-LOGOS  [OSHW-LOGO-S]  86.49,117.98 264 bottom
LOGO8  SFE_LOGO_NAME.1_INCH  [SFE_LOGO_NAME_.1]  121.67,155.96 0 bottom
LOGO9  OSHW-LOGOS  [OSHW-LOGO-S]  9.78,194.69 264 bottom
LOGO10  SFE_LOGO_NAME.1_INCH  [SFE_LOGO_NAME_.1]  44.96,232.66 0 bottom
LOGO11  OSHW-LOGOS  [OSHW-LOGO-S]  86.49,194.69 264 bottom
LOGO12  SFE_LOGO_NAME.1_INCH  [SFE_LOGO_NAME_.1]  121.67,232.66 0 bottom
U$1  [LUMINI_3#2]  40.89,7.94 180 bottom
U$2  [60_APA102_LEDS0]  38.42,10.86 180 bottom
U$3  [54]  76.33,61.34 60 bottom
U$4  [5V6]  78.68,45.59 86.4 bottom
U$5  [G4]  78.49,47.88 86.4 bottom
U$6  [105]  64.05,74.82 30 bottom
U$7  [DO3]  78.23,37.85 97 bottom
U$8  [CO1]  78.42,39.94 97 bottom
U$9  [CI6]  78.71,41.94 90 bottom
U$10  [DI4]  78.61,44.01 90 bottom
U$11  [207]  28.78,76.5 330 bottom
U$12  [258]  15.15,64.16 300 bottom
U$13  [309]  9.44,46.72 270 bottom
U$14  [3510]  13.41,28.7 240 bottom
U$15  [4011]  25.72,15.2 210 bottom
U$16  [5013]  61.01,13.35 150 bottom
U$17  [5514]  74.83,25.82 120 bottom
U$18  [LUMINI_3#2]  117.6,7.94 180 bottom
U$19  [5V6]  155.38,45.59 86.4 bottom
U$20  [G4]  155.19,47.88 86.4 bottom
U$21  [DO3]  154.94,37.85 97 bottom
U$22  [CO1]  155.13,39.94 97 bottom
U$23  [CI6]  155.42,41.94 90 bottom
U$24  [DI4]  155.32,44.01 90 bottom
U$25  [60_APA102_LEDS0]  115.13,10.86 180 bottom
U$26  [54]  153.03,61.34 60 bottom
U$27  [105]  140.75,74.82 30 bottom
U$28  [207]  105.49,76.5 330 bottom
U$29  [258]  91.86,64.16 300 bottom
U$30  [309]  86.14,46.72 270 bottom
U$31  [3510]  90.12,28.7 240 bottom
U$32  [4011]  102.43,15.2 210 bottom
U$33  [5013]  137.72,13.35 150 bottom
U$34  [5514]  151.54,25.82 120 bottom
U$35  [LUMINI_3#2]  40.89,84.65 180 bottom
U$36  [5V6]  78.68,122.3 86.4 bottom
U$37  [G4]  78.49,124.59 86.4 bottom
U$38  [DO3]  78.23,114.55 97 bottom
U$39  [CO1]  78.42,116.65 97 bottom
U$40  [CI6]  78.71,118.64 90 bottom
U$41  [DI4]  78.61,120.71 90 bottom
U$42  [60_APA102_LEDS0]  38.42,87.57 180 bottom
U$43  [54]  76.33,138.05 60 bottom
U$44  [105]  64.05,151.52 30 bottom
U$45  [207]  28.78,153.21 330 bottom
U$46  [258]  15.15,140.87 300 bottom
U$47  [309]  9.44,123.43 270 bottom
U$48  [3510]  13.41,105.41 240 bottom
U$49  [4011]  25.72,91.91 210 bottom
U$50  [5013]  61.01,90.06 150 bottom
U$51  [5514]  74.83,102.53 120 bottom
U$52  [LUMINI_3#2]  117.6,84.65 180 bottom
U$53  [5V6]  155.38,122.3 86.4 bottom
U$54  [G4]  155.19,124.59 86.4 bottom
U$55  [DO3]  154.94,114.55 97 bottom
U$56  [CO1]  155.13,116.65 97 bottom
U$57  [CI6]  155.42,118.64 90 bottom
U$58  [DI4]  155.32,120.71 90 bottom
U$59  [60_APA102_LEDS0]  115.13,87.57 180 bottom
U$60  [54]  153.03,138.05 60 bottom
U$61  [105]  140.75,151.52 30 bottom
U$62  [207]  105.49,153.21 330 bottom
U$63  [258]  91.86,140.87 300 bottom
U$64  [309]  86.14,123.43 270 bottom
U$65  [3510]  90.12,105.41 240 bottom
U$66  [4011]  102.43,91.91 210 bottom
U$67  [5013]  137.72,90.06 150 bottom
U$68  [5514]  151.54,102.53 120 bottom
U$69  [LUMINI_3#2]  40.89,161.35 180 bottom
U$70  [5V6]  78.68,199.01 86.4 bottom
U$71  [G4]  78.49,201.3 86.4 bottom
U$72  [DO3]  78.23,191.26 97 bottom
U$73  [CO1]  78.42,193.36 97 bottom
U$74  [CI6]  78.71,195.35 90 bottom
U$75  [DI4]  78.61,197.42 90 bottom
U$76  [60_APA102_LEDS0]  38.42,164.27 180 bottom
U$77  [54]  76.33,214.76 60 bottom
U$78  [105]  64.05,228.23 30 bottom
U$79  [207]  28.78,229.92 330 bottom
U$80  [258]  15.15,217.58 300 bottom
U$81  [309]  9.44,200.14 270 bottom
U$82  [3510]  13.41,182.12 240 bottom
U$83  [4011]  25.72,168.62 210 bottom
U$84  [5013]  61.01,166.76 150 bottom
U$85  [5514]  74.83,179.24 120 bottom
U$86  [LUMINI_3#2]  117.6,161.35 180 bottom
U$87  [5V6]  155.38,199.01 86.4 bottom
U$88  [G4]  155.19,201.3 86.4 bottom
U$89  [DO3]  154.94,191.26 97 bottom
U$90  [CO1]  155.13,193.36 97 bottom
U$91  [CI6]  155.42,195.35 90 bottom
U$92  [DI4]  155.32,197.42 90 bottom
U$93  [60_APA102_LEDS0]  115.13,164.27 180 bottom
U$94  [54]  153.03,214.76 60 bottom
U$95  [105]  140.75,228.23 30 bottom
U$96  [207]  105.49,229.92 330 bottom
U$97  [258]  91.86,217.58 300 bottom
U$98  [309]  86.14,200.14 270 bottom
U$99  [3510]  90.12,182.12 240 bottom
U$100  [4011]  102.43,168.62 210 bottom
U$101  [5013]  137.72,166.76 150 bottom
U$102  [5514]  151.54,179.24 120 bottom

## Library data of the parts
C1-C6 = SparkFun-Capacitors; PROD_ID: CAP-10300
D1-D360 = SparkFun-LED; PROD_ID: DIO-13883
E$6 = SparkFun-Retired
E$7 E$8 FD1-FD24 LOGO1-LOGO12 = SparkFun-Aesthetics
H1-H48 = SparkFun-Hardware
J1-J18 = SparkFun-Connectors
U$1 U$18 U$35 U$52 U$69 U$86 = buzzard_labels (8)
U$2 U$25 U$42 U$59 U$76 U$93 = buzzard_labels (3)
U$3 U$6 U$11-U$17 U$26-U$34 U$43-U$51 U$60-U$68 U$77-U$85 U$94-U$102 = buzzard_labels (5)
U$4 U$5 U$7 U$8 U$19-U$22 U$36-U$39 U$53-U$56 U$70-U$73 U$87-U$90 = buzzard_labels (25)
U$9 U$10 U$23 U$24 U$40 U$41 U$57 U$58 U$74 U$75 U$91 U$92 = buzzard_labels (26)